# Altium PCB USBDM_SWD_JS16CWJ-CS.PcbDoc
Units mil, origin at the board's own origin, x right, y up, seen from the top; angles counter-clockwise.
Board outline 1793.07 x 787.4 mil, 2 copper layers (Top Layer, Bottom Layer); 35 components, 30 nets, 125 pads, 22 vias.
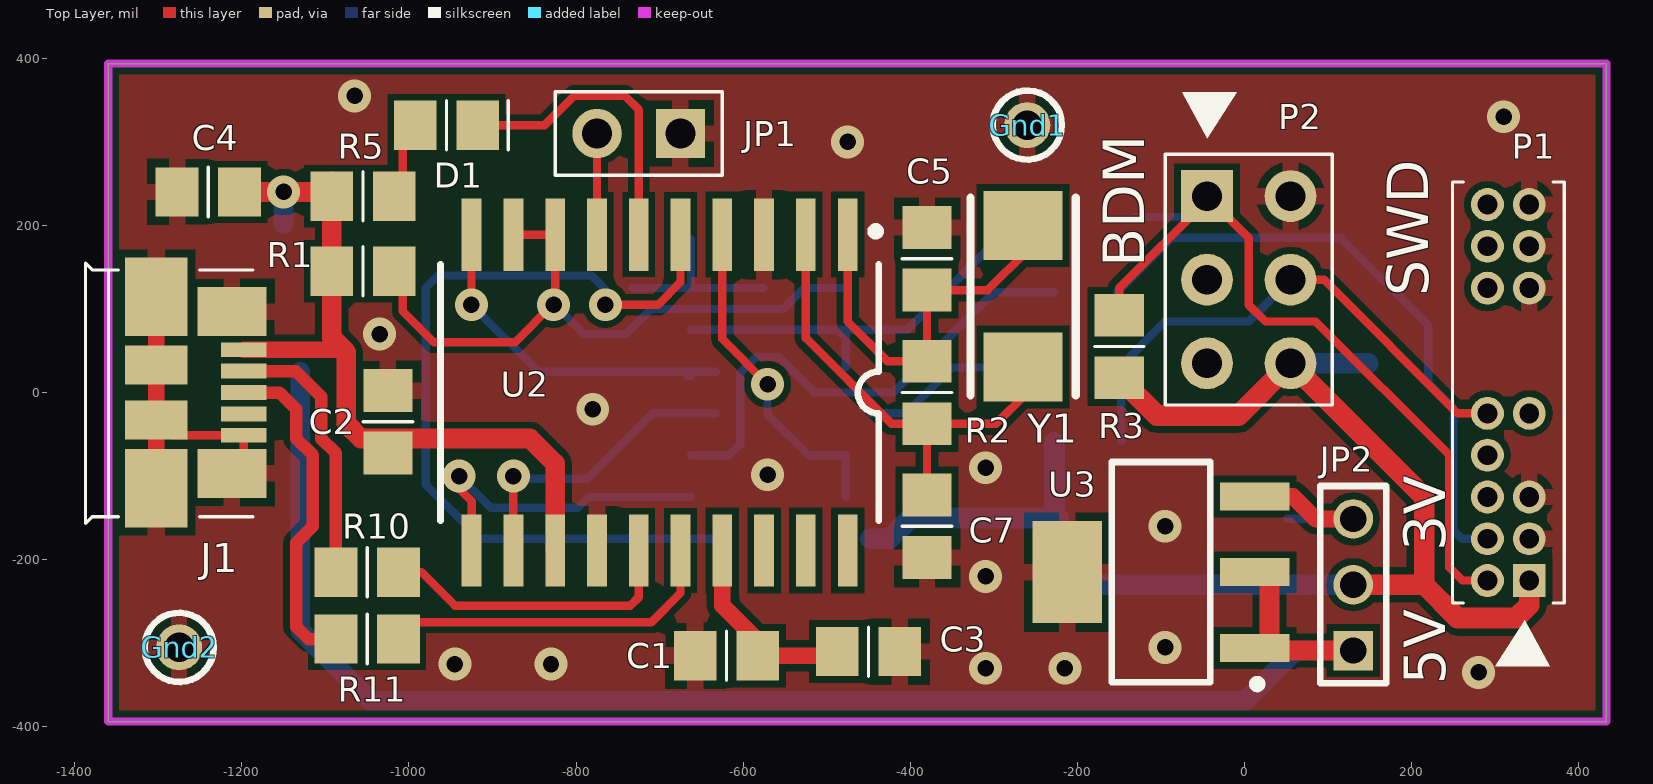
[diagram p0: Top Layer view]
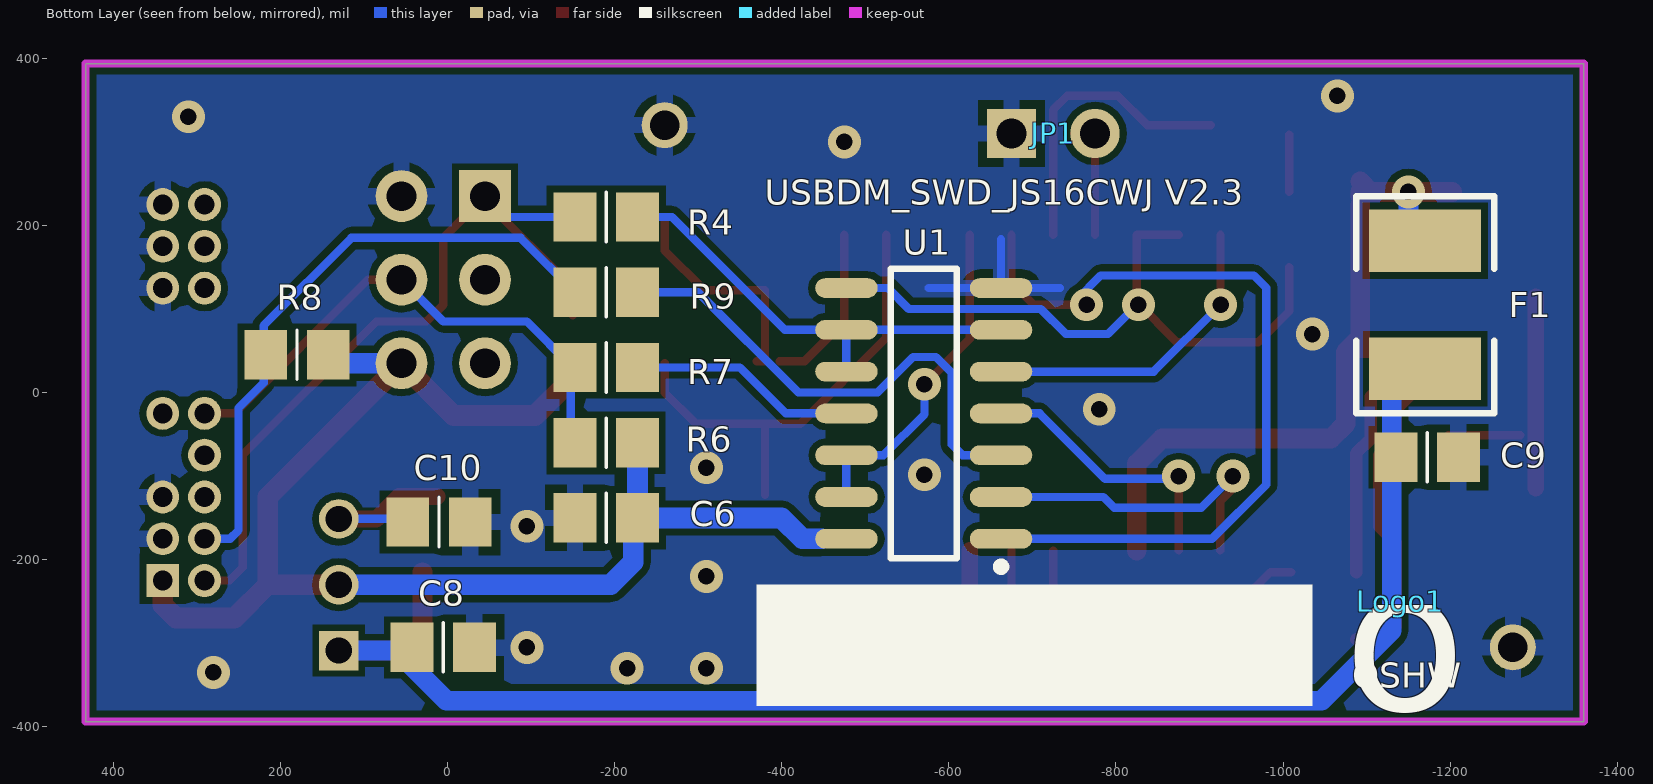
[diagram p1: Bottom Layer view, seen from below]
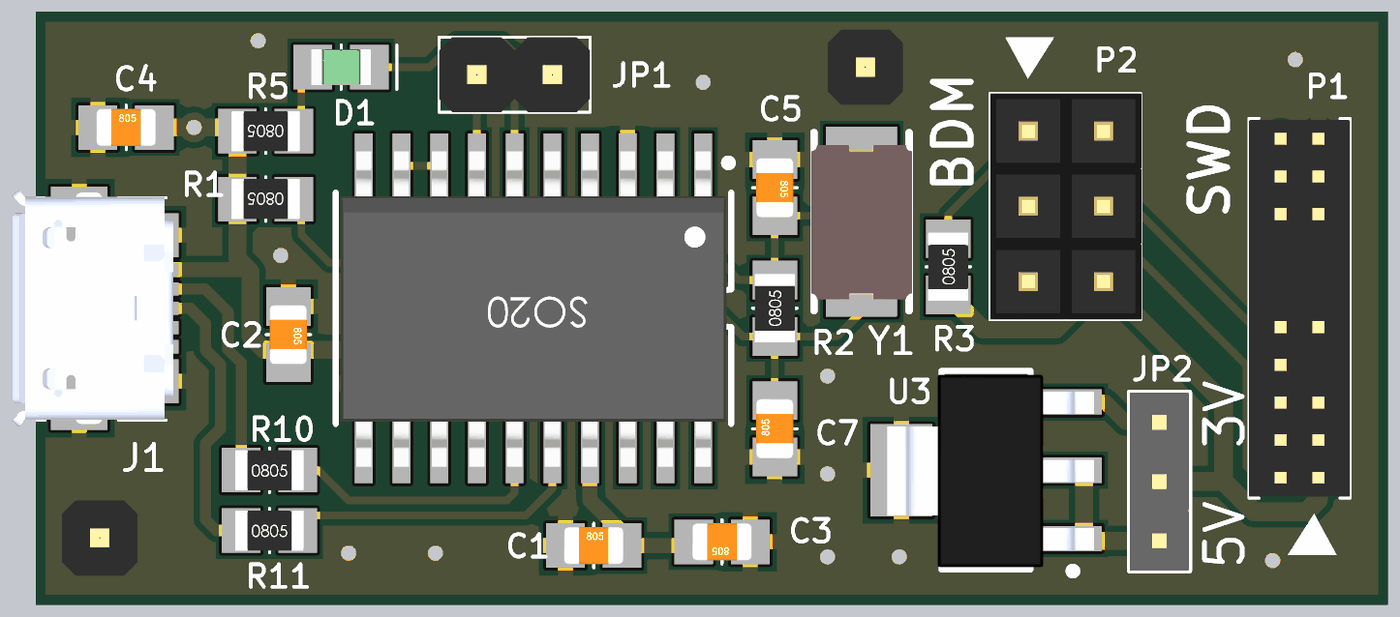
[diagram p2: 3D render of the assembled board from above, using the file's embedded part models]
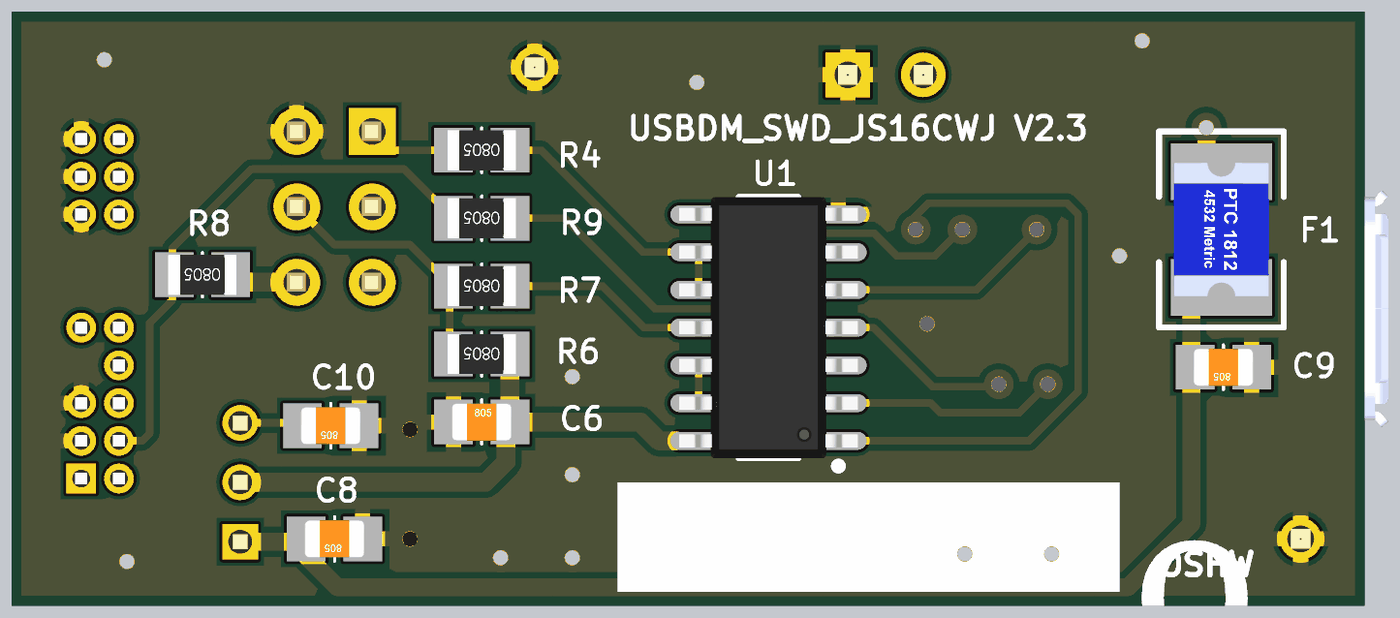
[diagram p3: 3D render of the assembled board from below, using the file's embedded part models]

## Layer stack, top to bottom
Top Solder: solder mask 0.4, Solder Resist, Dk 3.5
Top Layer: signal copper 1.4
Dielectric1: dielectric 12.6, FR-4, Dk 4.8
Bottom Layer: signal copper 1.4
Bottom Solder: solder mask 0.4, Solder Resist, Dk 3.5

## Board outline
-1360,-393.7 -1360,393.7 433.07,393.7 433.07,-393.7

## Design rules (kind name [scope] priority, off if disabled: settings)
Clearance "PolyGon Clearance" [All vs Inpoly] p1: gap=8 ignorepadtopadclearanceinfootprint=FALSE except(0: Arc-Hole Track-Hole SMDPad-Hole THPad-Hole Via-Hole Fill-Hole Poly-Hole Region-Hole Text-Hole)
Clearance Clearance_1 [All] p2: gap=5 ignorepadtopadclearanceinfootprint=FALSE except(0: Arc-Hole Track-Hole SMDPad-Hole THPad-Hole Via-Hole Fill-Hole Poly-Hole Region-Hole Text-Hole)
FabricationTestPointUsage TestPointUsage [All] p1: valid=0 allowmultiple=FALSE
FabricationTestpoint Testpoint [All] p1: side=3 testpointundercomponent=TRUE minsize=40 maxsize=100 preferedsize=60 minholesize=0 maxholesize=40 preferedholesize=32 testpointgrid=1 allowsidetop=TRUE allowsidebottom=TRUE usegrid=TRUE gridtolerance=0.01
HoleSize [All] p1: absolutevalues=TRUE maxlimit=300 minlimit=1 maxpercent=80.000 minpercent=20.000
PolygonConnect PolygonConnect_1 [InNet('GND') vs isvia] p1: connectstyle=Direct reliefconductorwidth=10 reliefentries=4 polygonreliefangle="90 Angle" airgapwidth=10
PolygonConnect [All] p2: connectstyle=Relief reliefconductorwidth=20 reliefentries=4 polygonreliefangle="90 Angle" airgapwidth=10
RoomDefinition USBDM_SWD_JS16CWJ [InComponentClass('USBDM_SWD_JS16CWJ')] p1: confinementstyle=ConfineIn formatcopy=TRUE lockcomponents=FALSE outline -1570,-420 460,-420 460,420 -1570,420
RoutingVias [All] p1: holewidth=28 width=50 viastyle="Through Hole" minholewidth=28 minwidth=50 maxholewidth=28 maxwidth=50
SilkToSolderMaskClearance SilkscreenOverComponentPads [IsPad] p1: minsilkscreentomaskgap=10 clearancetoexposedcopper=TRUE
SolderMaskExpansion [All] p1: expansion=4 istentingtop=FALSE
Width [All] p1: maxlimit=40 minlimit=10 preferedwidth=15 toplayer_prefwidth=10 minimp=50.000000 maximp=50.000000 favimp=50.000000
26 further rules are at their usual default settings.

## Components (designator, comment, footprint, x,y, rotation, side; value= is the part's Value field where it differs from the comment)
C1 "470nF" CCNP2012-0805 -620.08,-314.96 r0 top
C2 "470nF" CCNP2012-0805 -1025,-35 r270 top
C3 "4u7F/10V" CCNP2012-0805 -450,-310 r180 top
C4 "4u7F/10V" CCNP2012-0805 -1240,240 r0 top
C5 "18pF" CCNP2012-0805 -380,160 r270 top
C6 "470nF" CCNP2012-0805 -190,-150 r180 bottom
C7 "18pF" CCNP2012-0805 -380,-160 r90 top
C8 "4u7F/10V" CCNP2012-0805 5,-305 r0 bottom
C9 "470nF" CCNP2012-0805 -1172.64,-77.53 r0 bottom
C10 "4u7F/10V" CCNP2012-0805 10,-155 r0 bottom
D1 "LED Green" LED2012-0805-GREEN -955,320 r0 top
F1 "MINISMDC050F-2" PTC4532-1812 -1170,105 r270 bottom
Gnd1 "TP" "PCBPIN - 0.9mm" -260,320 r0 top
Gnd2 "TP" "PCBPIN - 0.9mm" -1275,-305 r0 top
J1 "USB_MICRO_B_CONNECTOR" "MOLEX - 47346-0001" -1250,0 r0 top
JP1 "PIN2X1" HDR1X2S -675,310 r0 bottom
JP2 "Header 1x3 2mm" "Header 1x3 (2mm)" 130,-230 r180 top
Logo1 "OSHW Logo" OSHW -1140,-250 r180 bottom
P1 "SWD-2x10" "SWD-2x10 - reduced" 340.63,-225 r90 top
P2 "BDM2X3" BDM -45,235 r270 top
R1 "1k5" CR2012-0805 -1055,145 r180 top
R2 "1M" CR2012-0805 -380,0 r90 top
R3 "100K" CR2012-0805 -150,55 r90 top
R4 "47R" CR2012-0805 -190,210 r0 bottom
R5 "680R" CR2012-0805 -1055,235 r180 top
R6 "100K" CR2012-0805 -190,-60 r0 bottom
R7 "47R" CR2012-0805 -190,30 r0 bottom
R8 "100K" CR2012-0805 180,45 r0 bottom
R9 "47R" CR2012-0805 -190,120 r0 bottom
R10 "33R" CR2012-0805 -1050,-215 r0 top
R11 "33R" CR2012-0805 -1050,-295 r0 top
U1 "SN74LV125AD" SO-14_L -570,-25 r0 bottom
U2 "MC9S08JS16CWJ" SO-G20 -800,0 r180 top
U3 "MC33375ST-3.3T3" SOT223 -100,-215 r180 top
Y1 "CX5032GB12000H0PESZZ" "XTAL_SMT - 5x3.2" -265,115 r90 top

## Footprints (in the part's own frame and the unit in brackets; to place one, negate y for a bottom-side part, rotate by r counter-clockwise, add the part's x,y. Pads: shape width x height; smd on the part's side, far side on the other; paste and mask are expansions set on the pad)
BDM [mil] "HCS12 style BDM connector"
  rect 62x62 hole 35.43: 1(0,0)
  round 62 hole 35.43: 2(0,100) 3(100,0) 4(100,100) 5(200,0) 6(200,100)
  silkscreen extent -124,-50 250,150, body extent -50,-49 250,151, height 333
CCNP2012-0805 [mm]
  rect 1.3x1.5 smd: 1(-0.95,0) 2(0.95,0)
  silkscreen extent 0,-0.75 0,0.75, body extent -1,-0.62 1,0.63, height 0.78
CR2012-0805 [mm]
  rect 1.3x1.5 smd: 1(-0.95,0) 2(0.95,0)
  silkscreen extent 0,-0.75 0,0.75, body extent -1.15,-0.67 1.15,0.68, height 0.76
HDR1X2S [mm]
  rect 1.5x1.5 hole 0.9: 1(0,0)
  round 1.5 hole 0.9: 2(-2.54,0)
  body extent -3.81,-1.27 1.27,1.27, height 6
"Header 1x3 (2mm)" [mm]
  rect 1.2x1.2 hole 0.8: 1(0,2)
  round 1.2 hole 0.8: 2(0,0) 3(0,-2)
  silkscreen extent -1,-3 1,3, body extent -1,-3 1,3, height 5
LED2012-0805-GREEN [mm] "SMT-LED 0805"
  rect 1.3x1.5 smd: A(-0.95,0) K(0.95,0)
  silkscreen extent 0,-0.75 1.88,0.75, body extent -1,-0.6 1,0.6, height 0.75
"MOLEX - 47346-0001" [mm] "RECEPTACLE, MICRO USB B, BOTTOM MOUNT"
  rect 1.38x0.45 smd: D+(1.33,0) D-(1.33,0.65) G(1.33,-1.3) ID(1.33,-0.65) Vbus(1.33,1.3)
  rect 1.9x2.38 smd: S1(-1.33,2.91) S4(-1.33,-2.91)
  rect 1.9x1.18 smd: S2(-1.33,0.838) S3(-1.33,-0.838)
  rect 2.1x1.48 smd: S5(0.97,2.46) S6(0.97,-2.46)
  silkscreen extent -3.48,-3.98 1.6,3.93, body extent -3.58,-3.99 1.85,3.99, height 2.72
OSHW [mil] "OSHW Logo"
"PCBPIN - 0.9mm" [mm]
  round 1.4 hole 0.9: 1(0,0)
  silkscreen extent -1.05,-1.05 1.05,1.05, body extent -1.27,-1.27 1.27,1.27, height 6
PTC4532-1812 [mm]
  rect 1.9x3.4 smd: 1(-1.95,0) 2(1.95,0)
  silkscreen extent -3.3,-2.1 3.3,2.1, body extent -2.25,-1.6 2.25,1.6, height 0.55
SO-14_L [mm] "14-Pin Small Outline Integrated Circuit 1.27 mm Pitch, IPC High Density"
  oval 1.9x0.6 smd: 1(-2.35,3.81) 2(-2.35,2.54) 3(-2.35,1.27) 4(-2.35,0) 5(-2.35,-1.27) 6(-2.35,-2.54) 7(-2.35,-3.81) 8(2.35,-3.81) 9(2.35,-2.54) 10(2.35,-1.27) 11(2.35,0) 12(2.35,1.27) 13(2.35,2.54) 14(2.35,3.81)
  silkscreen extent -2.47,-4.4 1,4.78, body extent -3,-4.4 3,4.4, height 1.7
SO-G20 [mm] "Small Outline, Plastic; 20 Leads; Body Width 7.5 mm"
  rect 0.6x2.2 smd: 1(-8.255,-4.8) 2(-6.985,-4.8) 3(-5.715,-4.8) 4(-4.445,-4.8) 5(-3.175,-4.8) 6(-1.905,-4.8) 7(-0.635,-4.8) 8(0.635,-4.8) 9(1.905,-4.8) 10(3.175,-4.8) 11(3.175,4.8) 12(1.905,4.8) 13(0.635,4.8) 14(-0.635,4.8) 15(-1.905,4.8) 16(-3.175,4.8) 17(-4.445,4.8) 18(-5.715,4.8) 19(-6.985,4.8) 20(-8.255,4.8)
  silkscreen extent -9.23,-5.02 4.12,3.9, body extent -9.04,-5.29 3.96,5.34, height 2.66
SOT223 [mm] "SOT223, 5-Leads, Body 6.5x3.5mm, Pitch 1.5mm, Lead Span 7mm, IPC High Density"
  rect 2.1x0.85 smd: 1(-2.85,2.3) 2(-2.85,0) 3(-2.85,-2.3)
  rect 2.1x3.1 smd: 4(2.85,0)
  silkscreen extent -3.05,-3.35 1.5,3.52, body extent -3.63,-3.22 3.33,3.28, height 1.7
"SWD-2x10 - reduced" [mm] "Connector; SWD; 2x10 Position"
  rect 1x1 hole 0.6: 1(0,0)
  round 1 hole 0.6: 2(0,1.27) 3(1.27,0) 4(1.27,1.27) 5(2.54,0) 6(2.54,1.27) 8(3.81,1.27) 9(5.08,0) 10(5.08,1.27) 15(8.89,0) 16(8.89,1.27) 17(10.16,0) 18(10.16,1.27) 19(11.43,0) 20(11.43,1.27)
  silkscreen extent -2.6,-1.06 12.11,2.34, body extent -0.64,-1.06 12.06,2.34, height 4.5
"XTAL_SMT - 5x3.2" [mm] "Crystal SMT 1368769 or similar"
  rect 2.1x2.4 smd: 1(-2.15,0) 2(2.15,0)
  silkscreen extent -3,-1.6 3,1.6, body extent -2.63,-1.7 2.57,1.7, height 1.3

## Part data
C1 C2 C5 C6 C7 C9: library part Cap, "Capacitor SMT 0805"
C3 C4 C8 C10: library part Cap_CCNP_0805, "Capacitor SMT 0805"
D1: library part LED-0805-Green, "LED 0805 Green"
F1: "PolySwitch miniSMDC Series, 500 mA, 1 A, 24 VDC"
Gnd1 Gnd2: "Test Point"
J1: "USB Micro-B Connector"
JP2: "Header, 1x3, 2mm"
P1: library part SWD2X10-Reduced, "SWD Connector 2x10-Pin"
P2: "HCS12 BDM connector"
R1 R2 R3 R4 R5 R6 R7 R8 R9 R10 R11: library part Res, "Resistor SMT"
U1: library part 74LV125AD, "Quad 3-state Buffer"
U2: "Microcontroller with USB"
U3: "Low Dropout 300mA Voltage Regulator with ON/OFF Control"
Y1: library part "Crystal - CX5032GB12000H0PESZZ", "AVX CRYSTAL, SM, CX-53F, 12MHZ"

## Via types
v1: diameter 39.37, hole 19.68, Top Layer to Bottom Layer, tented both sides, 22 vias

## Nets (pads, with @x,y where several pads share a name; then routed paths per layer and width w, separated by ;. In a path a pad name is that pad's centre, name@x,y a point inside that pad or via, vN(x,y) a via of type N, cw(c..) or ccw(c..) an arc to the next point about the centre after c; other vN are vias at no path point)
3V3: C10.2 JP2.3 U3.3 | length 207.8
  Top Layer w20: U3.3 58.19,-124.45 85,-151.26 JP2.3
  Bottom Layer w10: C10.2@51.14,-151.26 JP2.3
5V: C2.2 C4.2 F1.1 J1.Vbus R1.2 R5.2 U2.13 | length 921.5
  Top Layer w20: J1.Vbus -1077.99,51.18
  Top Layer w23.62: C4.2 v1(-1150,240) -1104.8,240 R5.2@-1092.4,252.4 ; R5.2@-1092.4,225 R1.2 -1092.4,65.59 -1077.99,51.18 -1075,48.19 -1075,-37.4 -1057.4,-55 -855,-55 -825,-85 U2.13 ; R5.2 R5.2@-1092.4,240
  Bottom Layer w23.62: F1.1@-1150,201.77 v1(-1150,240)
BKGD/LED: D1.K U2.6 | length 359.6
  Top Layer w10: D1.K@-913.66,320 -837.48,320 -802.48,355 -741.42,355 -725,338.58 U2.6
BKGD/SWD_DRV: U1.4 U2.12 | length 358.4
  Top Layer w10: U2.12 v1@-875,-105.48
  Bottom Layer w10: v1@-875,-103.35 -787.01,-103.35 -708.66,-25 U1.4 U1.4@-632.52,-25
  other v1: -875,-100
BKGD/SWD_I: R1.1 U1.8 U2.8 U2.9 | length 788.5
  Top Layer w10: R1.1@-1007.6,150 -1007.6,97.6 -970,60 -873.07,60 -825,108.07 U2.8 U2.9
  Bottom Layer w10: v1@-826.77,106.3 -790.47,70 -740,70 -710,100 -552.05,100 -527.05,125 U1.8
  other v1: -826.77,105
BKGD/SWD_IO: R4.1 U1.6 U1.9 U1.10 | length 531
  Bottom Layer w10: U1.6 U1.9@-482.48,75 ; U1.9@-482.48,70 -477.48,70 U1.10@-477.48,30 ; U1.9 -403.74,75 -268.74,210 R4.1
BKGD/SWD_O: U1.5 U2.10 | length 413.1
  Top Layer w10: v1@-925.2,110.24 U2.10@-925.2,188.78
  Bottom Layer w10: v1(-925.2,105) -845.2,25 U1.5 U1.5@-632.52,25 ; v1@-925.2,110.24 v1@-922.58,107.62 ; U1.5@-667.52,20 U1.5@-662.52,20
BLMS: JP1.2 U2.7 | length 131.4
  Top Layer w10: U2.7 -775,285 JP1.2@-750,310
GND: C1.1 C2.1 C3.1 C4.1 C5.1 C6.1 C7.1 C8.1 C9.1 C10.1 Gnd1.1 Gnd2.1 J1.G J1.S1 J1.S2 J1.S3 J1.S4 J1.S5 J1.S6 JP1.1 P1.3 P1.5 P1.15 P1.17 P1.19 P2.2 U1.7 U2.3 U2.14 U3.4 | length 562.7
  Top Layer w10: J1.S3@-1284.17,-51.18 J1.G J1.S6@-1197.64,-82.68
  Top Layer w20: J1.S4 J1.S3 J1.S2 J1.S1
  Bottom Layer w10: -733,125 U1.7 ; -662.52,183.52 U1.7 ; -576,125 U1.7
  other v1: 280,-335 -310,-330 -215,-330 -945,-325 -830,-325 -95,-305 -310,-220 -95,-160 -570.87,-98.43 -310,-90 -780,-20 -1035,70 -475,300 310,330 -1065,355
NetD1_A: D1.A R5.1 | length 68.7
  Top Layer w10: R5.1@-1007.6,240 D1.A@-1007.6,308.74
OSC1: C5.2 R2.2 U2.1 Y1.2 | length 470.8
  Top Layer w10: U2.1 -475,85 -427.4,37.4 R2.2@-397.4,37.4 ; R2.2@-370,37.4 R2.2 C5.2 -307.4,122.6 -260,170 Y1.2@-260,204.65
OSC2: C7.2 R2.1 U2.2 Y1.1 | length 567.4
  Top Layer w10: U2.2 -525,65 -422.6,-37.4 R2.1 ; C7.2 R2.1 ; Y1.1@-260,35.35 -260,0 -297.4,-37.4 R2.1
PTA5: U2.18
PTA6: U2.19
PTA7: U2.20
RST_IO: R7.1 U1.11 | length 242.9
  Bottom Layer w10: U1.11@-447.48,-25 -405,-25 -350,30 R7.1
RSTN_O: U1.12 U1.13 U2.4 | length 401.1
  Top Layer w10: U2.4 -625,63.98 v1(-570.87,9.84)
  Bottom Layer w10: v1(-570.87,9.84) -570.87,-26.06 -521.93,-75 U1.12 U1.13
SWCLK_BO: R9.1 U1.3 | length 601.3
  Bottom Layer w10: U1.3 -616.34,-75 -603.55,-62.21 -603.55,23.38 -584.4,42.53 -557.33,42.53 -514.8,0 -420,0 -300,120 R9.1
SWCLK_DRV: U1.1 U2.5 | length 1014.1
  Top Layer w10: v1(-765,105) -702.09,105 -675,132.09 U2.5
  Bottom Layer w10: v1@-751.97,110.24 -781.73,140 -965,140 -980,125 -980,-110 -915,-175 U1.1 U1.1@-632.52,-175
SWCLK_O: U1.2 U2.11 | length 393.6
  Top Layer w10: v1(-940,-100) -940,-115 -925,-130 U2.11
  Bottom Layer w10: v1(-940,-100) -902.2,-137.8 -797.8,-137.8 -785,-125 U1.2
T_BKGD/SWD: P1.2 P2.1 R3.2 R4.2 | length 932.8
  Top Layer w10: R3.2 -150,125 -45,230 P2.1@-45,250 ; P2.1 5,185 5,105 25,85 85,85 245,-75 245,-209.37 260.63,-225 P1.2
  Bottom Layer w10: R4.2@-130,210 P2.1@-50,210
T_RST: P1.10 P2.4 R6.2 R7.2 | length 637.4
  Top Layer w10: P2.4 95,135 255,-25 P1.10
  Bottom Layer w10: R6.2@-147.6,-58 -147.6,32.4 -95,85 5,85 P2.4
T_SWCLK: P1.4 R8.2 R9.2 | length 745.2
  Bottom Layer w10: R9.2 -87.6,185 115,185 220,80 220,11.43 250,-18.57 250,-165 260,-175 P1.4
USB+: J1.D+ R11.1 | length 401.3
  Top Layer w15: J1.D+ -1155,0 -1135,-20 -1135,-55 -1115,-75 -1115,-160 -1135,-180 -1135,-280 -1120,-295 R11.1
USB-: J1.D- R10.1 | length 322.6
  Top Layer w15: J1.D- -1135.59,25.59 -1105,-5 -1105,-55 -1087.4,-72.6 R10.1
USBDM: R10.2 U2.15 | length 361.7
  Top Layer w10: R10.2@-1010,-215 -985,-215 -945,-255 -735,-255 -725,-245 U2.15
USBDP: R11.2 U2.16 | length 383.1
  Top Layer w10: R11.2@-992.6,-275 -710,-275 -675,-240 U2.16
VDD: C8.2 C9.2 F1.2 JP2.1 U3.1 U3.2 | length 1815.2
  Top Layer w23.62: U3.1@29.92,-305.55 U3.2@29.92,-215 ; U3.1@35,-308.74 JP2.1
  Bottom Layer w23.62: F1.2@-1130.08,25 -1130.08,-284.92 -1046.11,-368.89 1.11,-368.89 61.26,-308.74 JP2.1
VDD_BDM: C6.2 JP2.2 P1.1 P2.6 R3.1 R6.1 R8.1 U1.14 | length 1678.2
  Top Layer w25: R3.1 -105,-27.4 -7.4,-27.4 P2.6 215,-125 215,-230 ; JP2.2 215,-230 ; P1.1 340.63,-254.37 325,-270 255,-270 215,-230
  Bottom Layer w25: U1.14@-447.48,-175 -425,-175 -400,-150 C6.2 ; R6.1 C6.2 ; P2.6 R8.1@147.6,35 ; JP2.2 -195,-230 -222.4,-202.6 -222.4,-150 C6.2
VUSB: C1.2 C3.2 U2.17 | length 215.9
  Top Layer w20: U2.17 -625,-255 -565.04,-314.96 C3.2@-500,-314.96
pads on no net: J1.ID P1.6 P1.8 P1.9 P1.16 P1.18 P1.20 P2.3 P2.5

## Polygon pours and split planes (outlines as drawn)
GND on Top Layer "Bottom Layer-GND" (solid, remove dead copper, pour order 1001): -1350,-393.7 -1350,393.7 433.07,393.7 433.07,-393.7
GND on Bottom Layer "Top Layer-GND" (solid, remove dead copper, pour order 1000): -1350,-393.7 -1350,393.7 433.07,393.7 433.07,-393.7

## Keep-outs
Keep-Out Layer:
  the board outline again, w10

## Silkscreen, mask and mechanical layers (free items; w line width, h text height)
Top Overlay:
  text "BDM" at -120,150 h50 r90
  text "SWD" at 220,115 h50 r90
  text "3V" at 240,-190 h50 r90
  text "5V" at 240,-350 h50 r90
Bottom Overlay:
  rectangle: -1035,-375 -370,-230
  text "USBDM_SWD_JS16CWJ V2.3" at -380,225 h30

## Text inside footprints (layer, text, board x,y; h text height)
Logo1: Bottom Overlay "OSHW" at -1083,-353 h30; Bottom Overlay "o" at -1219,-456 h400